# Altium PCB imx6_cpu_board.PcbDoc (part 5 of 9)
Units mil, origin at the board's own origin, x right, y up, seen from the top; angles counter-clockwise.
Board outline 2598.43 x 2362.2 mil, 8 copper layers (Top Layer, GND1, Signal Layer 1, POWER1, POWER2, Signal Layer 2, GND2, Bottom Layer), stack 66.304 mil thick; 354 components, 422 nets, 2180 pads, 1333 vias.
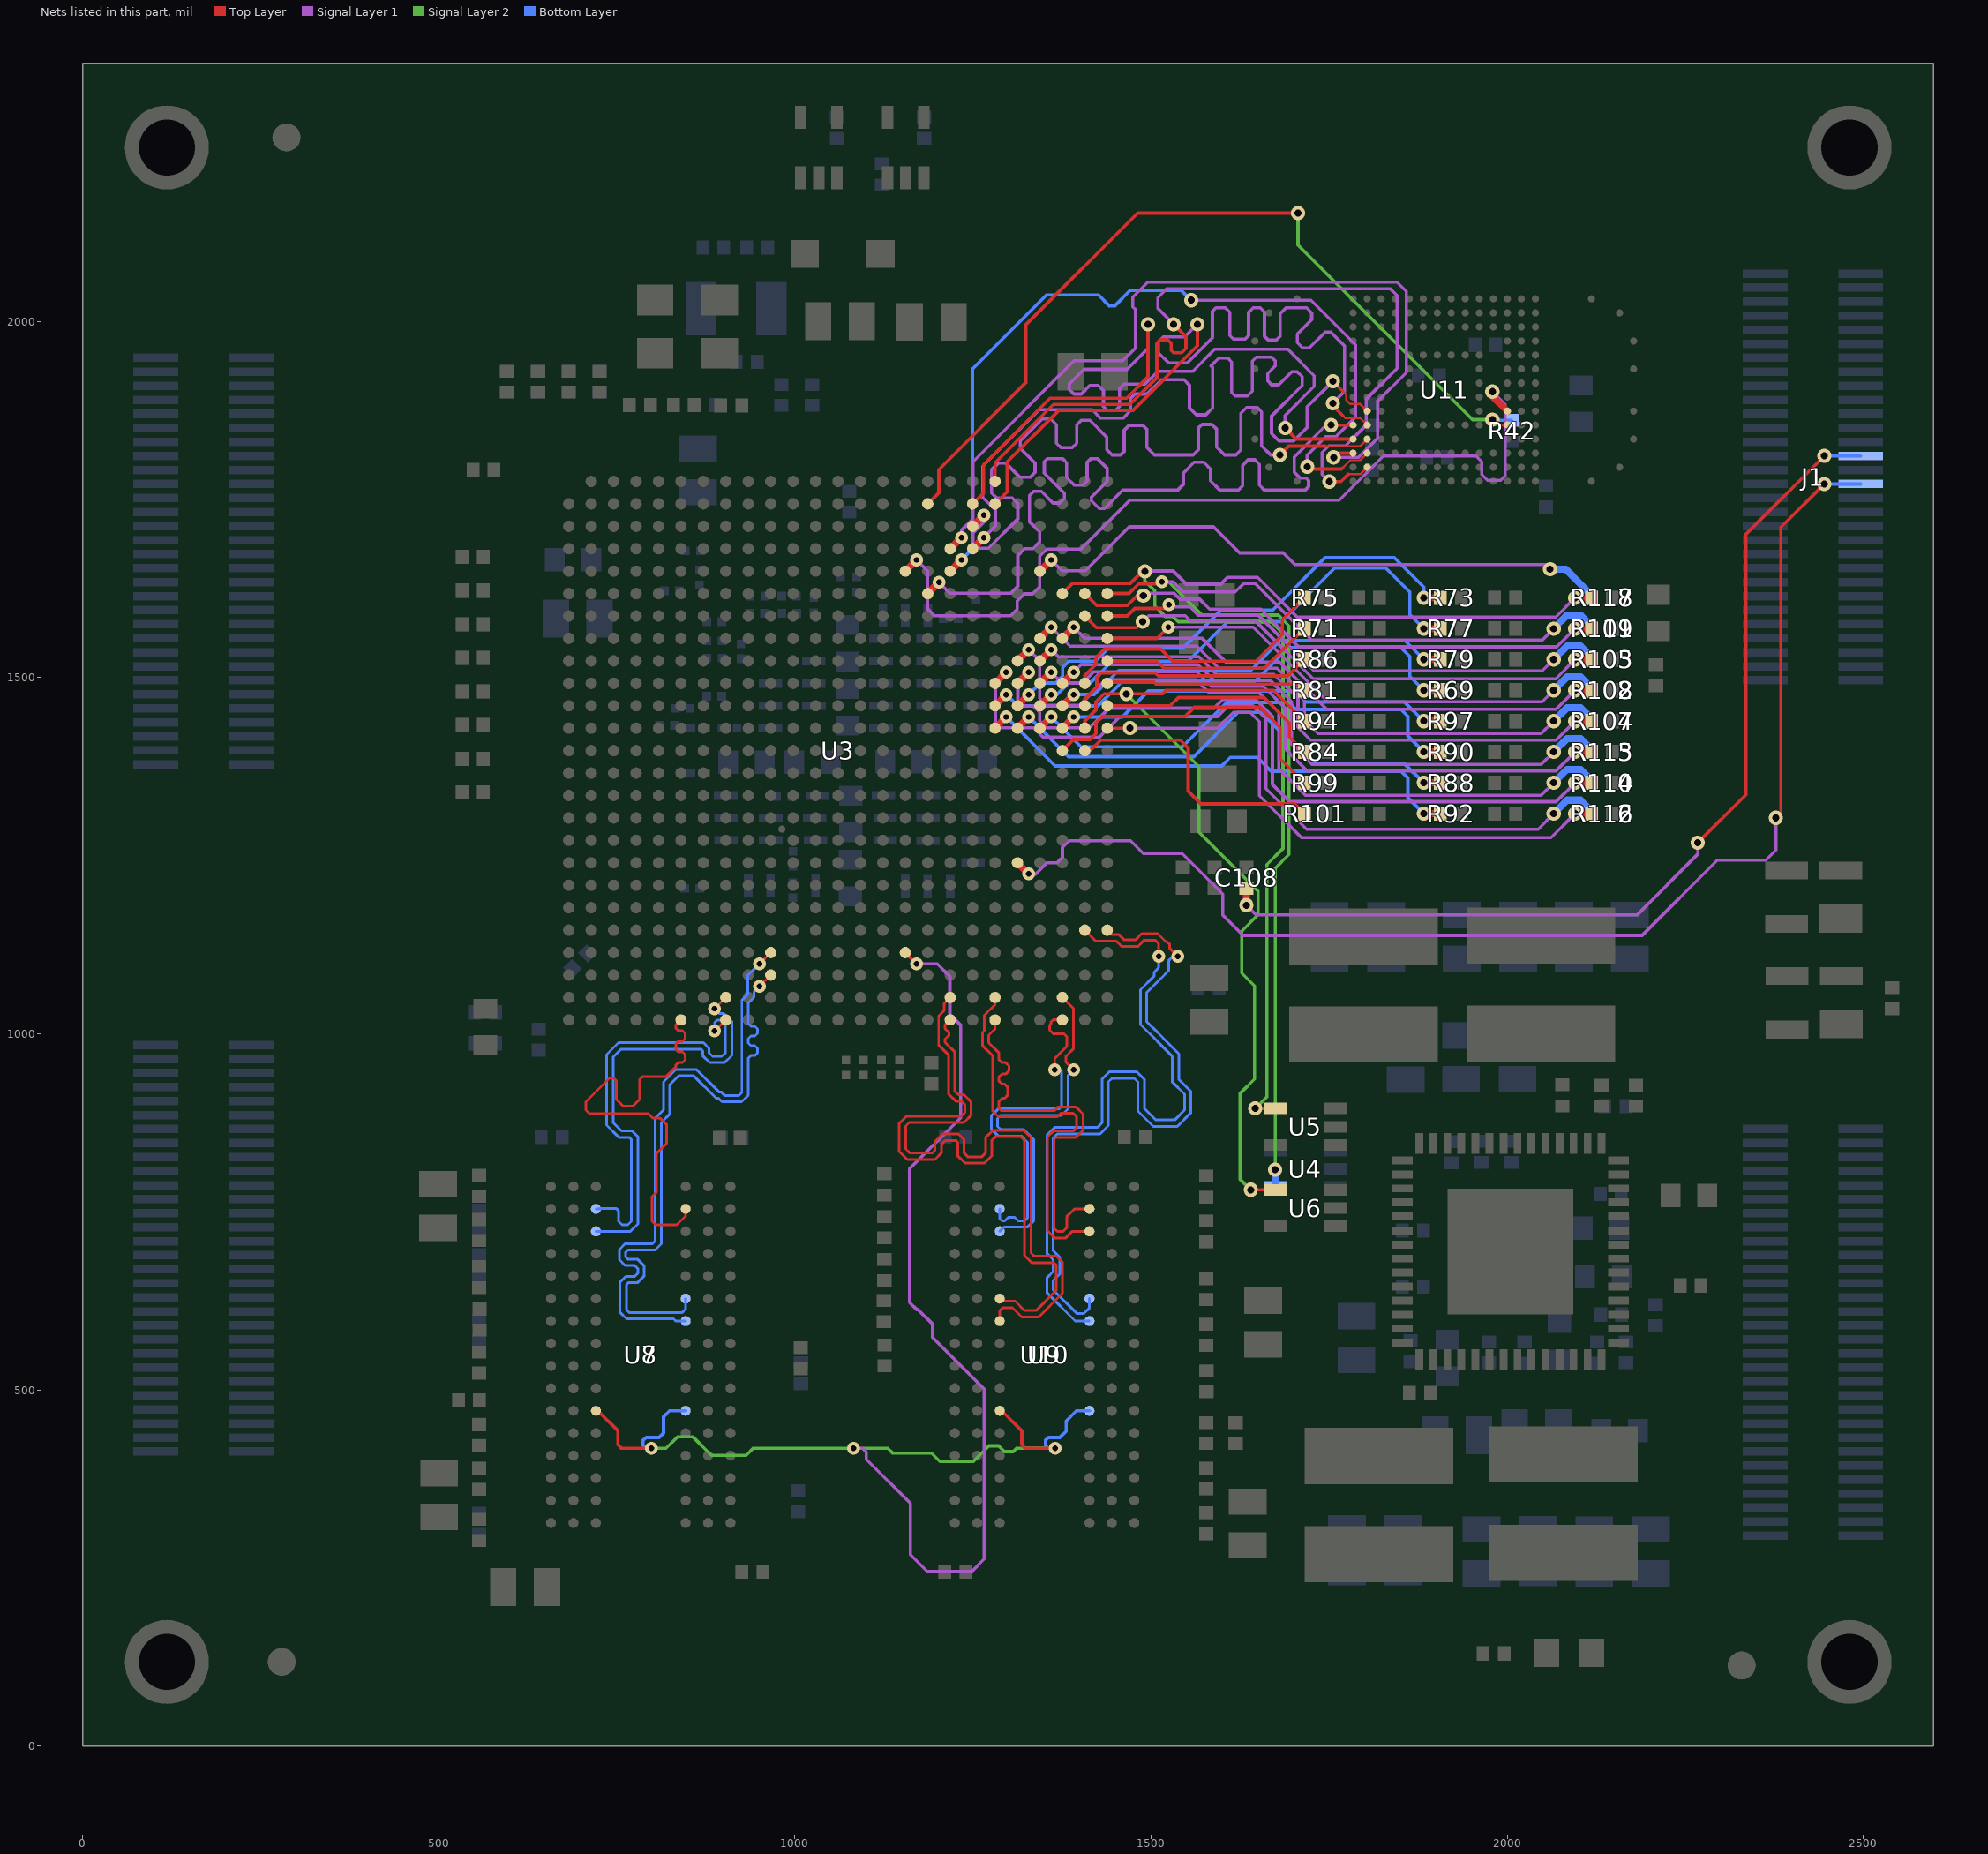
[diagram p11: the nets of this part, all layers, seen from the top]

## Via types
v1: diameter 18, hole 8, Top Layer to Bottom Layer, tented both sides, 768 vias
v2: diameter 20, hole 10, Top Layer to Bottom Layer, tented both sides, 565 vias

## Nets (pads, with @x,y where several pads share a name; then routed paths per layer and width w, separated by ;. In a path a pad name is that pad's centre, name@x,y a point inside that pad or via, vN(x,y) a via of type N, cw(c..) or ccw(c..) an arc to the next point about the centre after c; other vN are vias at no path point) (continued)
DRAM_SDQS1_B: U3.AE6 U8.B7 | length 657.7
  Top Layer w3.7: 812.87,839.21 820,846.35 820,872 810.66,881.34 800.7,881.34 794.2,887.84 711.38,887.84 706.38,892.84 706.38,904.41 739.96,938 745.15,938 749.29,933.87 749.29,907.94 758.89,898.34 772.49,898.34 782.09,907.94 782.09,935.89 785.79,939.59 818.98,939.59 832.53,953.14 832.53,956.03 836.23,959.73 842.03,959.73 845.73,963.43 845.73,970.83 842.03,974.53 836.23,974.53 832.53,978.23 832.53,985.63 836.23,989.33 842.03,989.33 845.73,993.03 845.73,1000.43 842.03,1004.13 836.23,1004.13 832.53,1007.83 832.53,1012.01 U3.AE6@839.91,1019.39 ; 812.88,839.21 805.38,831.71 805.38,777.34 799.33,771.29 799.33,736.58 804.33,731.58 833.96,731.58 846.38,744 846.38,754 U8.B7@846.43,754.07
DRAM_SDQS2: U3.AD8 U7.C7 | length 609
  Top Layer w3.7: v1(887.15,1035.14) U3.AD8@902.9,1050.88
  Bottom Layer w3.7: U7.C7@720.46,722.58 766.08,722.57 769.1,722.59 779.37,732.86 779.37,855.32 771.1,863.59 756.37,863.59 744.6,875.36 744.6,967.03 755.91,978.34 867.65,978.34 870.38,975.61 870.38,969.34 880.38,959.34 901.06,959.34 911.33,969.61 911.33,1017.07 900.06,1028.34 893.95,1028.34 v1(887.15,1035.14)
DRAM_SDQS2_B: U3.AE8 U7.B7 | length 608
  Top Layer w3.7: v1(887.15,1003.64) U3.AE8@902.9,1019.39
  Bottom Layer w3.7: U7.B7@720.46,754.07 725.13,754.06 725.38,754.32 749.37,754.32 752.37,751.32 752.37,736.59 757.37,731.59 765.37,731.59 770.37,736.59 770.37,851.59 767.37,854.59 752.64,854.59 735.6,871.63 735.6,970.76 752.18,987.34 871.38,987.34 879.38,979.34 879.38,973.07 884.11,968.34 897.33,968.34 902.33,973.34 902.33,1013.34 896.33,1019.34 890.83,1019.34 887.15,1015.66 v1(887.15,1003.64)
DRAM_SDQS3: U3.AC10 U7.F3 | length 852.5
  Top Layer w3.7: v1(950.14,1066.63) U3.AC10@965.89,1082.38
  Bottom Layer w3.7: U7.F3@846.44,628.09 846.44,613.4 841.66,608.62 767.1,608.62 763.39,612.33 763.39,647.62 766.1,650.34 778.64,650.34 788.38,660.08 788.38,673.86 778.64,683.6 765.12,683.6 762.39,686.34 762.39,693.35 765.38,696.34 803.63,696.34 812.38,705.09 812.38,875.34 824.38,887.34 824.38,928.65 836.57,940.84 857.88,940.84 889.38,909.34 892.65,909.34 897.65,904.34 925.11,904.34 934.38,913.61 934.38,965.61 938.08,969.31 943.68,969.31 947.38,973.01 947.38,979.31 943.68,983.01 938.08,983.01 934.38,986.71 934.38,993.01 938.08,996.71 943.68,996.71 947.38,1000.41 947.38,1006.71 943.68,1010.41 938.08,1010.41 934.38,1014.11 934.38,1043.14 942.5,1051.26 942.5,1058.98 946.16,1062.64 v1(950.14,1066.63)
DRAM_SDQS3_B: U3.AB10 U7.G3 | length 852.6
  Top Layer w3.7: v1(950.14,1098.13) U3.AB10@965.89,1113.88
  Bottom Layer w3.7: U7.G3@846.44,596.59 832.58,596.58 829.54,599.62 763.37,599.62 754.39,608.6 754.39,651.34 762.36,659.34 774.91,659.34 779.38,663.81 779.38,670.13 774.91,674.6 761.38,674.6 753.39,682.62 753.39,697.08 761.65,705.34 799.9,705.34 803.38,708.82 803.38,881.06 815.38,893.07 815.38,932.38 832.84,949.84 861.61,949.84 893.11,918.34 896.38,918.34 901.38,913.34 921.38,913.34 925.38,917.34 925.38,1046.87 933.5,1054.99 933.5,1081.48 v1(950.14,1098.13)
DRAM_SDQS4: U3.AD18 U10.F3 | length 924.3
  Top Layer w3.7: U3.AD18@1217.86,1050.88 1209.32,1042.34 1209.32,1032.41 1202.61,1025.7 1202.61,1025.57 1201.61,1024.57 1201.61,984.11 1215.38,970.34 1215.38,915.61 1225.65,905.34 1233.38,905.34 1238.38,900.34 1238.38,889.34 1233.38,884.34 1156.65,884.34 1146.38,874.07 1146.38,834.61 1157.65,823.34 1196.38,823.34 1205.38,832.34 1205.38,844.61 1211,850.23 1225.76,850.23 1228.38,847.61 1228.38,828.61 1238.65,818.34 1266.11,818.34 1276.38,828.61 1276.38,850.34 1281.38,855.34 1317.38,855.34 1322.38,850.34 1322.38,688.34 1332.22,678.5 1363.49,678.5 1366.38,675.61 1366.38,639.38 1338.34,611.34 1322.11,611.34 1309.07,624.38 1291.09,624.38 U10.F3@1287.38,628.09
DRAM_SDQS4_B: U3.AE18 U10.G3 | length 923.9
  Top Layer w3.7: U3.AE18@1217.86,1019.39 1217.43,1019.39 1210.61,1012.57 1210.61,1007.11 1216.38,1001.34 1216.38,998.11 1210.61,992.34 1210.61,987.84 1224.38,974.07 1224.38,919.34 1229.38,914.34 1237.11,914.34 1247.38,904.07 1247.38,885.61 1237.11,875.34 1160.38,875.34 1155.38,870.34 1155.38,838.34 1161.38,832.34 1192.65,832.34 1196.38,836.07 1196.38,848.34 1207.27,859.23 1229.49,859.23 1237.38,851.34 1237.38,832.34 1242.38,827.34 1262.38,827.34 1267.38,832.34 1267.38,854.07 1277.65,864.34 1321.11,864.34 1331.38,854.07 1331.38,692.07 1335.95,687.5 1367.22,687.5 1375.38,679.34 1375.38,635.65 1342.07,602.34 1318.38,602.34 1305.34,615.38 1291.42,615.38 1287.39,611.35 U10.G3@1287.38,596.59
DRAM_SDQS5: U3.AD20 U10.C7 | length 558.3
  Top Layer w3.7: U3.AD20@1280.85,1050.88 1280.85,1040.81 1274.68,1034.64 1274.54,1034.64 1265.6,1025.7 1265.6,1004.29 1262.96,1001.65 1262.96,983.55 1277.38,969.13 1277.38,891.61 1285.65,883.34 1368.11,883.34 1373.11,888.34 1390.38,888.34 1395.38,883.34 1395.38,868.34 1390.38,863.34 1362.65,863.34 1354.38,855.07 1354.38,723.61 1364.65,713.34 1380.11,713.34 1389.34,722.57 U10.C7@1413.36,722.58
DRAM_SDQS5_B: U3.AE20 U10.B7 | length 559.1
  Top Layer w3.7: U3.AE20@1280.85,1019.39 1280.85,1006.81 1271.96,997.92 1271.96,987.28 1286.38,972.86 1286.38,963.34 1290.38,959.34 1295.69,959.34 1300.38,954.65 1300.38,948.03 1295.69,943.34 1290.38,943.34 1286.38,939.34 1286.38,933.34 1290.38,929.34 1294.38,929.34 1298.38,925.34 1298.38,913.34 1294.38,909.34 1290.38,909.34 1286.38,905.34 1286.38,895.34 1289.38,892.34 1364.38,892.34 1369.38,897.34 1394.11,897.34 1404.38,887.07 1404.38,864.61 1394.11,854.34 1366.38,854.34 1363.38,851.34 1363.38,727.34 1368.38,722.34 1376.38,722.34 1381.38,727.34 1381.38,743.08 1392.36,754.06 U10.B7@1413.36,754.07
DRAM_SDQS6: U3.AD23 U9.C7 | length 517.4
  Top Layer w3.7: U3.AD23@1375.34,1050.88 1390.59,1035.64 1390.59,978.6 1383.33,971.35 1380.1,968.12 1380.1,960.5 v1(1391.32,949.28)
  Bottom Layer w3.7: U9.C7@1287.39,722.58 1287.61,722.57 1293.38,728.34 1326.11,728.34 1335.38,737.61 1335.38,851.34 1321.38,865.34 1288.88,865.34 1284.38,869.84 1284.38,880.84 1288.88,885.34 1374.11,885.34 1383.38,894.61 1383.38,941.47 1391.25,949.34 1391.25,949.28 v1(1391.32,949.28)
DRAM_SDQS6_B: U3.AE23 U9.B7 | length 517.9
  Top Layer w3.7: v1(1364.51,949.34) 1364.51,965.27 1374.33,975.09 1381.59,982.34 1381.59,995.88 1377.33,1000.14 1362.38,1000.14 1357.38,1005.14 1357.38,1011.37 1359.08,1013.07 1359.08,1016.09 1362.38,1019.39 U3.AE23@1375.34,1019.39
  Bottom Layer w3.7: U9.B7@1287.39,754.07 1287.39,740.34 1290.39,737.34 1294.38,737.34 1299.38,742.34 1308.38,742.34 1313.38,737.34 1322.38,737.34 1326.38,741.34 1326.38,847.61 1317.65,856.34 1285.15,856.34 1275.38,866.11 1275.38,884.57 1285.15,894.34 1370.38,894.34 1374.38,898.34 1374.38,946.39 1371.43,949.34 v1(1364.51,949.34)
DRAM_SDQS7: U3.AA25 U9.F3 | length 1017.7
  Top Layer w3.7: U3.AA25@1438.33,1145.37 1444.65,1139.05 1454.83,1139.05 1462.31,1131.58 1477.84,1131.58 1486.65,1140.39 1509.24,1140.39 1520.37,1129.26 1522.19,1129.26 1526.03,1125.42 1526.03,1119.56 v1(1537.25,1108.34)
  Bottom Layer w3.7: U9.F3@1413.37,628.09 1413.37,615.02 1405.7,607.34 1395.38,607.34 1362.38,640.34 1362.38,653.34 1371.38,662.34 1371.38,686.34 1362.38,695.34 1362.38,853.34 1368.38,859.34 1428.29,859.34 1439.88,870.93 1439.88,932.34 1444.88,937.34 1476.33,937.34 1481.33,932.34 1481.33,891.39 1502.83,869.89 1536.56,869.89 1555.84,889.16 1555.84,918.61 1538.83,935.62 1538.83,971.62 1517.23,993.22 1517.23,993.64 1502.68,1008.19 1502.26,1008.19 1493.83,1016.62 1493.83,1058.06 1513.16,1077.39 1513.33,1077.39 1524.33,1088.39 1524.33,1102.34 1530.34,1108.34 v1(1537.25,1108.34)
DRAM_SDQS7_B: U3.AA24 U9.G3 | length 1017.5
  Top Layer w3.7: U3.AA24@1406.84,1145.37 1422.15,1130.05 1451.1,1130.05 1458.58,1122.58 1481.57,1122.58 1490.38,1131.39 1505.51,1131.39 1510.51,1126.39 v1(1510.51,1108.34)
  Bottom Layer w3.7: U9.G3@1413.37,596.59 1393.41,596.58 1353.38,636.61 1353.38,657.07 1362.38,666.07 1362.38,682.61 1353.38,691.61 1353.38,857.07 1364.65,868.34 1424.56,868.34 1430.88,874.66 1430.88,936.07 1441.15,946.34 1480.06,946.34 1490.33,936.07 1490.33,895.12 1506.56,878.89 1532.83,878.89 1546.84,892.89 1546.84,914.88 1529.83,931.89 1529.83,967.89 1508.23,989.49 1508.23,989.91 1498.95,999.19 1498.53,999.19 1484.83,1012.89 1484.83,1061.79 1504.42,1081.38 1504.42,1086.39 1510.51,1092.48 v1(1510.51,1108.34)
DRAM_WE_B: U3.AB16 U7.L3 U8.L3 U9.L3 U10.L3 | length 2338.3
  Top Layer w4.7: U8.L3@720.45,470.61 723.19,470.6 751.45,442.34 751.45,422.84 756.45,417.84 v1(798.45,417.84) ; U3.AB16@1154.87,1113.88 v1(1170.62,1098.13) ; U10.L3@1287.38,470.61 1290.12,470.6 1318.38,442.34 1318.38,422.84 1323.38,417.84 v1(1365.38,417.84)
  Signal Layer 1 w4.5: v1(1081.88,417.84) 1094.88,417.84 1100.05,412.67 1100.05,402.55 1161.88,340.73 1161.88,268.84 1185.38,245.34 1248.38,245.34 1265.38,262.34 1265.38,501.34 1193.13,573.59 1193.13,592.27 1172.57,612.83 1170.83,612.83 1160.87,622.79 1160.87,810.31 1229.39,878.83 ; v1(1170.62,1098.13) 1199.59,1098.13 1217.38,1080.34 1217.38,1027.34 1232.38,1012.34 1232.38,881.85 1230.88,880.35 ; 1229.39,878.85 1230.88,880.34
  Signal Layer 2 w4.5: v1(798.45,417.84) 818.79,417.84 834.83,433.89 856.83,433.89 882.61,408.11 931.5,408.11 941.24,417.84 v1(1081.88,417.84) 1130.34,417.84 1136.84,411.34 1191.35,411.34 1191.7,410.99 1202.86,399.84 ; 1202.88,399.84 1203.38,399.34 1250.29,399.34 1272.33,421.39 1285.83,421.39 1293.88,413.34 1306.38,413.34 1310.88,417.84 v1(1365.38,417.84)
  Bottom Layer w4.7: v1(798.45,417.84) 790.88,417.84 786.38,422.34 786.38,428.69 790.88,433.19 809.23,433.19 815.47,439.43 815.47,462.24 823.83,470.6 U7.L3@846.44,470.61 ; v1(1365.38,417.84) 1355.88,417.84 1351.38,422.34 1351.38,428.69 1355.88,433.19 1371.74,433.19 1380.73,442.18 1380.73,456.39 1394.94,470.6 U9.L3@1413.37,470.61
EIM-A16: R102.1 U3.H25 | length 754.4
  Top Layer w4.7: U3.H25@1438.33,1554.82 1508.25,1554.82 v1(1524,1570.57)
  Signal Layer 1 w4.5: v1(1524,1570.57) 1643.2,1570.57 1747.96,1465.81 2048.77,1465.81 v2(2065,1482.05)
  Bottom Layer w10: v2@2065,1482.08 2083.97,1501.05 2102.87,1501.05 2118.11,1485.81 R102.1@2118.11,1482.05
EIM-A17: R103.1 U3.G24 | length 772.7
  Top Layer w4.7: U3.G24@1406.84,1586.32 1423.16,1570 1479.63,1570 v2(1488,1578.37)
  Top Layer w10: v2(2095,1525.35) R103.1@2118.11,1525.35
  Signal Layer 1 w4.5: v2(1488,1578.37) 1496.27,1586.64 1547.81,1586.64 1555.38,1579.07 1646.72,1579.07 1727.48,1498.31 1760.95,1498.31 1774.42,1498.33 ; 1774.44,1498.31 1837.13,1498.31 1850.61,1498.33 2067.96,1498.31 v2(2095,1525.35)
EIM-A18: R104.1 U3.J22 | length 868.3
  Top Layer w10: U3.J22@1343.84,1523.32 v1(1359.59,1539.07) ; v2(2095,1438.74) R104.1@2118.11,1438.74
  Signal Layer 1 w4.5: v1(1359.59,1539.07) 1369.66,1529 1566.98,1529 1591.48,1504.5 1672.5,1504.5 1706.1,1470.9 1706.1,1429.9 1723.79,1412.21 2068.47,1412.21 v2(2095,1438.74)
EIM-A19: R105.1 U3.G25 | length 749.4
  Top Layer w4.7: U3.G25@1438.33,1586.32 1466.32,1586.32 1477,1597 1520,1597 v1(1525,1602)
  Signal Layer 1 w4.5: v1(1525,1602) 1528.05,1598.95 1554.58,1598.95 1565.96,1587.57 1650.24,1587.57 1728.68,1509.14 1875.77,1509.14 ; 1875.78,1509.12 2048.77,1509.12 v2(2065,1525.35)
  Bottom Layer w10: v2@2065,1525.39 2083.97,1544.35 2102.87,1544.35 2118.11,1529.11 R105.1@2118.11,1525.35
EIM-A20: R107.1 U3.H22 | length 888
  Top Layer w10: U3.H22@1343.84,1554.82 v1(1359.59,1570.57)
  Signal Layer 1 w4.5: v1(1359.59,1570.57) 1386.16,1544 1564,1544 1595,1513 1676.73,1513 1715.1,1474.63 1715.1,1440.28 1734.17,1421.21 2047.47,1421.21 v2(2065,1438.74)
  Bottom Layer w10: v2(2065,1438.74) 2083.97,1457.74 2102.87,1457.74 2118.11,1442.5 R107.1@2118.11,1438.74
EIM-A21: R108.1 U3.H23 | length 807.9
  Top Layer w10: U3.H23@1375.34,1554.82 v1(1391.08,1570.57) ; v2(2095,1482.05) R108.1@2118.11,1482.05
  Signal Layer 1 w4.5: v1(1391.08,1570.57) 1406.33,1555.32 1571.18,1555.32 1605,1521.5 1680.25,1521.5 1746.23,1455.52 2068.47,1455.52 v2(2095,1482.05)
EIM-A22: R109.1 U3.F24 | length 767.2
  Top Layer w4.7: U3.F24@1406.84,1617.81 1423.65,1601 1466.38,1601 1480.38,1615 v2(1489,1615)
  Top Layer w10: v2(2095,1568.66) R109.1@2118.11,1568.66
  Signal Layer 1 w4.5: v2(1489,1615) 1492.31,1618.31 1532,1618.31 1540.31,1610 1567.89,1610 1581.82,1596.07 1653.76,1596.07 1706.83,1543 2069.34,1543 v2(2095,1568.66)
EIM-A23: R110.1 U3.J21 | length 1029.5
  Top Layer w10: U3.J21@1312.35,1523.32 v1(1328.09,1539.07)
  Signal Layer 1 w4.5: v1(1328.09,1539.07) 1343.34,1523.82 1343.34,1470.76 1353.27,1460.83 1399.52,1460.83 1435.68,1497 1562.92,1497 1581.82,1478.1 1651.9,1478.1 1679.1,1450.9 1679.1,1372 1716.5,1334.6 2047.47,1334.6 v2(2065,1352.13)
  Bottom Layer w10: v2(2065,1352.13) 2083.97,1371.13 2102.87,1371.13 2118.11,1355.89 R110.1@2118.11,1352.13
EIM-A24: R111.1 U3.F25 U4.4 | length 1755.1
  Top Layer w4.7: U3.F25@1438.33,1617.81 1468.69,1617.81 1482.23,1631.35 1512.05,1631.35 v1(1515,1634.3)
  Signal Layer 1 w4.5: v1(1515,1634.3) 1530.7,1634.3 1545,1620 1618,1620 1629.95,1631.95 1645.93,1631.95 1725.45,1552.43 2048.77,1552.43 v2(2065,1568.66)
  Signal Layer 2 w4.5: v1(1515,1634.3) 1524.4,1634.3 1571.13,1587.57 1678.43,1587.57 1693.5,1572.5 1693.5,1251.5 1673.99,1231.99 v2(1673.99,809.3)
  Bottom Layer w10: U4.4@1673.99,784.72 v2(1673.99,809.3) ; v2@2065,1568.69 2083.97,1587.66 2102.87,1587.66 2118.11,1572.42 R111.1@2118.11,1568.66
EIM-DA0: R69.1 U3.L20 | length 713.1
  Top Layer w10: U3.L20@1280.85,1460.33 v1(1296.6,1476.08) ; v2(1882.51,1482.06) R69.1@1905.86,1482.06
  Bottom Layer w4.7: v1(1296.6,1476.08) 1312.68,1460 1425,1460 1448.65,1483.65 1448.65,1483.77 1459.88,1495 1646,1495 1692.74,1541.74 1850.65,1541.74 1863,1529.38 1863,1501.58 v2(1882.51,1482.06)
EIM-DA1: R71.1 U3.J25 | length 303.9
  Top Layer w4.7: U3.J25@1438.33,1523.32 1507.68,1523.32 1518,1513 1659.17,1513 R71.1@1714.87,1568.69
EIM-DA2: R73.1 U3.L21 | length 718.5
  Top Layer w10: U3.L21@1312.35,1460.33 v1(1328.09,1476.08) ; v2(1882.52,1611.98) R73.1@1905.87,1611.98
  Bottom Layer w4.7: v1(1328.09,1476.08) 1344.24,1492.23 1365.95,1492.23 1375.73,1502.01 1375.73,1513.94 1384.72,1522.93 1421.93,1522.93 1440,1541 1544.3,1541 1597.79,1594.49 1670.49,1594.49 1744,1668 1841.52,1668 1882.52,1627 v2(1882.52,1611.98)
EIM-DA3: R75.1 U3.K24 | length 396.2
  Top Layer w4.7: U3.K24@1406.84,1491.83 1406.84,1502.84 1422.59,1518.59 1422.59,1527.88 1434.71,1540 1513.37,1540 1530.37,1523 1647,1523 1684,1560 1684,1581.13 R75.1@1714.87,1612
EIM-DA4: R77.1 U3.L22 | length 695.8
  Top Layer w10: U3.L22@1343.84,1460.33 v1(1359.59,1476.08) ; v2(1882.51,1568.68) R77.1@1905.86,1568.68
  Bottom Layer w4.7: v1(1359.59,1476.08) 1368.08,1476.08 1384.22,1492.22 1414.29,1492.22 1445,1522.93 1551.93,1522.93 1607.37,1578.37 1682.37,1578.37 1757.54,1653.54 1829.46,1653.54 1863,1620 1863,1588.19 v2(1882.51,1568.68)
EIM-DA5: R79.1 U3.L23 | length 579.5
  Top Layer w10: U3.L23@1375.34,1460.33 v1(1391.08,1476.08) ; v2(1882.51,1525.37) R79.1@1905.86,1525.37
  Bottom Layer w4.7: v1(1391.08,1476.08) 1420.34,1476.08 1454.26,1510 1639.65,1510 1681.65,1552 1855.88,1552 v2(1882.51,1525.37)
EIM-DA6: R81.1 U3.K25 | length 281.8
  Top Layer w4.7: U3.K25@1438.33,1491.83 1439.85,1493.35 1503.79,1493.35 1506.36,1490.78 1706.17,1490.78 R81.1@1714.87,1482.08
EIM-DA7: R84.1 U3.L25 | length 324.6
  Top Layer w4.7: U3.L25@1438.33,1460.33 1526.38,1460.33 1538.04,1472 1658,1472 1694,1436 1694,1416.33 R84.1@1714.87,1395.46
EIM-DA8: R86.1 U3.L24 | length 351.8
  Top Layer w4.7: U3.L24@1406.84,1460.33 1406.84,1469.84 1423.51,1486.51 1423.51,1499.85 1429.84,1506.18 1505.82,1506.18 1510,1502 1691.48,1502 R86.1@1714.87,1525.39
EIM-DA9: R88.1 U3.M21 | length 689.3
  Top Layer w10: U3.M21@1312.35,1428.84 v1(1328.09,1444.59) ; v2(1882.51,1352.14) R88.1@1905.86,1352.14
  Bottom Layer w4.7: v1(1328.09,1444.59) 1383.68,1389 1560,1389 1621,1450 ; 1621,1451 1654,1451 1725.89,1379.11 1855.54,1379.11 v2(1882.51,1352.14)
EIM-DA10: R90.1 U3.M22 | length 656.7
  Top Layer w10: U3.M22@1343.84,1428.84 v1(1359.59,1444.59) ; v2(1882.51,1395.45) R90.1@1905.86,1395.45
  Bottom Layer w4.7: v1(1359.59,1444.59) 1401.41,1402.78 1543.78,1402.78 1606,1465 1693.17,1465 1703.05,1455.12 1850.65,1455.12 1860.22,1445.54 1860.22,1417.74 v2(1882.51,1395.45)
EIM-DA11: R92.1 U3.M20 | length 714
  Top Layer w10: U3.M20@1280.85,1428.84 v1(1296.6,1444.59) ; v2(1882.51,1308.83) R92.1@1905.86,1308.83
  Bottom Layer w4.7: v1(1296.6,1444.59) 1365.19,1376 1599,1376 1611,1388 1649,1388 1668.49,1368.51 1825,1368.51 1850.64,1368.51 1860.22,1358.93 1860.22,1331.13 v2(1882.51,1308.83)
EIM-DA12: R94.1 U3.M24 U6.4 | length 1198.9
  Top Layer w4.7: U3.M24@1406.84,1428.84 1406.84,1438.84 1422.59,1454.59 1422.59,1465.78 1433.81,1477 v2(1465,1477) 1516,1477 1521.08,1482.08 1671.56,1482.08 R94.1@1714.87,1438.77 ; v2(1639.62,780.87) v2(1639.62,780.87) U6.4@1673.99,780.81
  Signal Layer 2 w4.5: v2(1465,1477) 1567,1375 1567,1283 1650,1200 1650,1167 1627,1144 1627,1085 1645,1067 1645,936.36 1625,916.36 1625,795.49 v2(1639.62,780.87)
EIM-DA13: R97.1 U3.M23 | length 569.7
  Top Layer w10: U3.M23@1375.34,1428.84 v1(1391.08,1444.59) ; v2(1882.51,1438.76) R97.1@1905.86,1438.76
  Bottom Layer w4.7: v1(1391.08,1444.59) 1459.59,1444.59 1496.13,1481.13 1702.12,1481.13 1717.52,1465.73 1855.54,1465.73 v2(1882.51,1438.76)
EIM-DA14: R99.1 U3.N23 | length 443
  Top Layer w4.7: U3.N23@1375.34,1397.34 1390.85,1412.85 1414,1412.85 1422.59,1421.44 1422.59,1436.18 1431.76,1445.35 1547.63,1445.35 1560.41,1458.13 1652.87,1458.13 1681,1430 1681,1386.02 R99.1@1714.87,1352.16
EIM-DA15: R101.1 U3.N24 | length 392.2
  Top Layer w4.7: U3.N24@1406.84,1397.34 1414.49,1397.34 1429.15,1412 1541,1412 1552,1401 1552,1340.6 1569.88,1322.72 1701,1322.72 R101.1@1714.87,1308.85
EIM-EB0: R114.1 U3.K21 | length 1038.2
  Top Layer w10: U3.K21@1312.35,1491.83 v1(1328.09,1507.58) ; v2(2095,1352.13) R114.1@2118.11,1352.13
  Signal Layer 1 w4.5: v1(1328.09,1507.58) 1312.84,1492.33 1312.84,1469.76 1322.76,1459.84 1334.41,1459.84 1343.34,1450.91 1343.34,1439.27 1353.27,1429.34 1413.34,1429.34 1441,1457 1588.33,1457 1600.43,1469.1 1646.53,1469.1 1670.1,1445.53 1670.1,1349.9 1694.4,1325.6 2068.47,1325.6 v2(2095,1352.13)
EIM-EB1: R115.1 U3.K23 | length 871.7
  Top Layer w10: U3.K23@1375.34,1491.83 v1(1391.08,1507.58)
  Signal Layer 1 w4.5: v1(1391.08,1507.58) 1401.5,1518 1565.96,1518 1587.96,1496 1667,1496 1697.1,1465.9 1697.1,1406.49 1725.68,1377.91 2047.47,1377.91 v2(2065,1395.43)
  Bottom Layer w10: v2(2065,1395.43) 2083.97,1414.43 2102.87,1414.43 2118.11,1399.19 R115.1@2118.11,1395.43
EIM-EB2: R117.1 U3.E22 | length 856.1
  Top Layer w10: U3.E22@1343.84,1649.31 v1(1359.59,1665.06)
  Signal Layer 1 w4.5: v1(1359.59,1665.06) 1374.84,1649.81 1407.44,1649.81 1469.13,1711.5 1587.52,1711.5 1624.07,1674.95 1685.36,1674.95 1701.75,1658.56 2053.44,1658.56 v2(2060,1652)
  Bottom Layer w10: v2(2060,1652) 2081.84,1652 2102.87,1630.97 2118.11,1615.73 R117.1@2118.11,1611.97
EIM-EB3: R118.1 U3.F23 U5.4 | length 1763.3
  Top Layer w4.7: U3.F23@1375.34,1617.81 1389.69,1632.16 1470.74,1632.16 1487.39,1648.81 v2(1491,1648.81) ; v2(1645.94,894.98) U5.4@1673.99,894.98
  Top Layer w10: v2(2095,1611.97) R118.1@2118.11,1611.97
  Signal Layer 1 w4.5: v2(1491,1648.81) 1491.74,1649.55 1530.72,1649.55 1549.27,1631 1597.58,1631 1607.03,1640.45 1649.45,1640.45 1704.96,1584.94 2067.97,1584.94 v2(2095,1611.97)
  Signal Layer 2 w4.5: v2(1491,1648.81) 1491,1635.98 1505.25,1621.73 1505.25,1600.18 1519.61,1585.82 1530.32,1585.82 1537.77,1578.37 1669,1578.37 1685,1562.37 1685,1260 1662.25,1237.25 1662.25,911.29 v2(1645.94,894.98)
EIM-LBA: R113.1 U3.K22 | length 895.7
  Top Layer w10: U3.K22@1343.84,1491.83 v1(1359.59,1507.58) ; v2(2095,1395.43) R113.1@2118.11,1395.43
  Signal Layer 1 w4.5: v1(1359.59,1507.58) 1374.84,1492.33 1403.71,1492.33 1419.38,1508 1563.94,1508 1584.44,1487.5 1657.5,1487.5 1688.1,1456.9 1688.1,1399.74 1718.93,1368.91 2068.47,1368.91 v2(2095,1395.43)
EIM-RW: R116.1 U3.K20 | length 1118.2
  Top Layer w10: U3.K20@1280.85,1491.83 v1(1296.6,1507.58)
  Signal Layer 1 w4.5: v1(1296.6,1507.58) 1281.35,1492.33 1281.35,1438.27 1290.28,1429.34 1335,1429.34 1348.34,1416 1427,1416 1456.25,1445.25 1593.13,1445.25 1607.98,1460.1 1642.8,1460.1 1661.1,1441.8 1661.1,1343.9 1718,1287 2043.18,1287 v2(2065,1308.82)
  Bottom Layer w10: v2(2065,1308.82) 2083.97,1327.82 2102.87,1327.82 2118.11,1312.58 R116.1@2118.11,1308.82
EIM-WAIT: R112.1 U3.M25 | length 836.8
  Top Layer w4.7: U3.M25@1438.33,1428.84 1469.84,1428.84 v2(1470,1429)
  Top Layer w10: v2(2095,1308.82) R112.1@2118.11,1308.82
  Signal Layer 1 w4.5: v2(1470,1429) 1593.35,1429 1615.35,1451 1639.03,1451 1652,1438.03 1652,1334 1711,1275 2061.18,1275 v2(2095,1308.82)
EMMC-CLK: U3.E16 U11.W6 | length 1226.1
  Top Layer w10: U3.E16@1154.87,1649.31 v1(1170.62,1665.06) ; v2(1979,1901.32) 1979,1895.01 U11.W6@2000,1874.01
  Signal Layer 1 w4.5: v1(1170.62,1665.06) 1185.87,1649.81 1185.87,1596.74 1195.79,1586.82 1302.92,1586.82 1311.85,1595.75 1311.85,1607.4 1321.77,1617.32 1333.43,1617.32 1343.35,1627.24 1343.35,1670.39 1353.27,1680.31 1401.31,1680.31 1470,1749 1764,1749 1826,1811 1956,1811 1964,1803 1964,1785 1972.14,1776.86 1990.86,1776.86 1997,1783 1997,1883.32 v2(1979,1901.32)
EMMC-CMD: R42.1 U3.B17 U11.W5 | length 1226.4
  Top Layer w4.7: U3.B17@1186.36,1743.8 1201.8,1759.24 1201.8,1791.8 1324,1914 1324,1995 1481,2152 v2(1706.17,2152) ; v2(1979,1862) 1986.67,1854.33 U11.W5@2000,1854.33
  Signal Layer 2 w4.5: v2(1706.17,2152) 1706.17,2106.92 1951.09,1862 v2(1979,1862)
  Bottom Layer w4.7: v2(1979,1862) 1980,1861 R42.1@2006,1861
EMMC-DATA0: U3.D18 U11.H3 | length 1226.4
  Top Layer w4.7: v2(1756,1809) 1761.96,1814.96 U11.H3@1783.47,1814.96
  Top Layer w10: U3.D18@1217.86,1680.8 v1(1233.61,1696.55)
  Signal Layer 1 w4.5: v1(1233.61,1696.55) 1233.61,1706.48 1249.86,1722.73 1249.86,1802.86 1391.89,1944.89 1460.45,1944.89 1478.12,1962.56 1478.12,2016.44 1474.13,2020.43 1474.13,2033.89 1495.24,2055 1845,2055 1858,2042 1858,1928 1818,1888 1818,1836 1791,1809 v2(1756,1809)
EMMC-DATA1: U3.B19 U11.H4 | length 1226.9
  Top Layer w4.7: U3.B19@1249.36,1743.8 1264.9,1759.34 1264.9,1798.9 1358,1892 1465.47,1892 1495.38,1921.9 v2(1495.38,1996) ; v2(1688,1850.39) 1703.75,1834.64 U11.H4@1783.47,1834.64
  Signal Layer 1 w4.5: v2(1495.38,1996) 1495.38,1962 1465.95,1932.57 1405.46,1932.57 1385,1912.11 1385,1904.55 1391.55,1898 1401.88,1898 1413.88,1910 1425.78,1910 1433,1902.78 1433,1880.33 1438.73,1874.6 1449.6,1874.6 1455.78,1880.78 1455.78,1905.78 1462,1912 1491.34,1912 1509.34,1930 1558.2,1930 1589.2,1961 1691.44,1961 1728.68,1923.77 1728.68,1908.68 1688,1868 v2(1688,1850.39)
EMMC-DATA2: U3.F17 U11.H5 | length 1226.8
  Top Layer w4.7: v2(1752.5,1854.33) U11.H5@1783.47,1854.33
  Top Layer w10: U3.F17@1186.36,1617.81 v1(1202.11,1633.56)
  Signal Layer 1 w4.5: v1(1202.11,1633.56) 1217.36,1618.31 1302.92,1618.31 1312.85,1628.24 1312.85,1671.38 1322.47,1681 1334.12,1681 1343.45,1690.33 1343.45,1704.55 1329,1719 1329,1755.18 1335.1,1761.28 1345.88,1761.28 1362.16,1745 1372,1745 1378,1751 1378,1758.66 1350,1786.66 1350,1803 1354,1807 1375.84,1807 1381.38,1801.46 1381.38,1780.62 1392,1770 1404.16,1770 1410,1775.84 1410,1802 1415,1807 1425,1807 1438,1794 1438,1774.96 1416,1752.96 1416,1748.38 1427,1737.38 1434.36,1737.38 1459.98,1763 1537,1763 1545,1771 1545,1786.91 1560.29,1802.2 1573.71,1802.2 1583.2,1792.71 1583.2,1776.13 1596.33,1763 1622,1763 1628.2,1769.2 1628.2,1797.7 1636.08,1805.58 1645.42,1805.58 1652,1799 1652,1770 1659,1763 1716,1763 1721,1768 1721,1776.46 1717.66,1779.8 1709.2,1779.8 1701,1788 1701,1809.74 1745.59,1854.33 v2(1752.5,1854.33)
EMMC-DATA3: U3.A20 U11.J2 | length 1226.3
  Top Layer w3: 1776.83,1785.39 1793.27,1785.39 U11.J2@1803.15,1795.27
  Top Layer w4.7: U3.A20@1280.85,1775.29 1280.85,1801.47 1362.68,1883.3 1470.17,1883.3 1507.87,1921 1507.87,1968.87 1513,1974 1523,1974 1528,1969 1528,1959.22 1531.39,1955.82 1542.7,1955.82 1548.87,1962 1548.87,1978.53 v2(1531.39,1996) ; v2(1750,1775) 1766.44,1775 1776.83,1785.39
  Signal Layer 1 w4.5: v2(1531.39,1996) 1509.38,2018.02 1509.38,2033.38 1521.86,2045.86 1835.34,2045.86 1845,2036.2 1845,1934 1802,1891 1802,1854.71 1772.54,1825.25 1749.27,1825.25 1739.75,1815.73 1739.75,1785.25 v2(1750,1775)
EMMC-DATA4: U3.E18 U11.J3 | length 1226.8
  Top Layer w3: 1768.54,1794.2 1779.41,1805.07 1793.26,1805.07 U11.J3@1803.15,1814.96
  Top Layer w4.7: v2(1719,1796) 1722.46,1792.54 1766.88,1792.54 1768.54,1794.2
  Top Layer w10: U3.E18@1217.86,1649.31 v1(1233.61,1665.06)
  Signal Layer 1 w4.5: v2(1556,2029.61) 1724.39,2029.61 1787,1967 1787,1865.85 1759.23,1838.08 1745.08,1838.08 1719,1812 v2(1719,1796)
  Bottom Layer w4.7: v1(1233.61,1665.06) 1248.96,1680.41 1248.96,1932.96 1353,2037 1426,2037 1441,2022 1449,2022 1470.51,2043.51 1542.1,2043.51 v2(1556,2029.61)
EMMC-DATA5: U3.C19 U11.J4 | length 1226.8
  Top Layer w3: 1744,1824.84 1793.35,1824.84 U11.J4@1803.15,1834.64
  Top Layer w4.7: v2(1680.72,1812.44) 1693.12,1824.84 1744,1824.84
  Top Layer w10: U3.C19@1249.36,1712.3 v1(1265.11,1728.05)
  Signal Layer 1 w4.5: v1(1265.11,1728.05) 1265.11,1718.12 1249.86,1702.87 1249.86,1690.23 1258.79,1681.3 1271.43,1681.3 1312.85,1722.72 1312.85,1744.29 1305.14,1752 1283,1752 1276,1759 1276,1792 1284.81,1800.81 1296.19,1800.81 1316,1781 1330.12,1781 1337,1787.88 1337,1801 1316,1822 1316,1832 1347,1863 1359,1863 1367,1855 1367,1829 1373.47,1822.53 1389,1822.53 1395.47,1829 1395.47,1854.47 1402,1861 1414,1861 1437.38,1837.62 1437.38,1820.06 1445,1812.44 1457,1812.44 1462,1817.44 1462,1847.05 1468.95,1854 1488.38,1854 1494,1848.38 1494,1823 1504.56,1812.44 1559,1812.44 1566.2,1819.64 1566.2,1850.2 1571.29,1855.29 1585.04,1855.29 1592,1848.33 1592,1823.44 1603,1812.44 1619,1812.44 1626,1819.44 1626,1871 1634,1879 1649,1879 1655,1873 1655,1825 1667.56,1812.44 v2(1680.72,1812.44)
EMMC-DATA6: U3.B20 U11.J5 | length 1226.5
  Top Layer w3: 1768.64,1868 1772.51,1864.13 1793.35,1864.13 U11.J5@1803.15,1854.33
  Top Layer w4.7: U3.B20@1280.85,1743.8 1297.6,1760.55 1297.6,1802.6 1369.6,1874.6 1473.78,1874.6 1565,1965.82 v2(1565,1996) ; v2(1755,1885) 1755,1881.64 1768.64,1868
  Signal Layer 1 w4.5: v2(1565,1996) 1547,1978 1517,1978 1510,1971 1510,1956 1524.18,1941.82 1550.82,1941.82 1586,1977 1586,2014 1591,2019 1604,2019 1610.3,2012.7 1610.3,1980 1615.3,1975 1631.7,1975 1636.7,1980 1636.7,2012.45 1643.25,2019 1653,2019 1659,2013 1659,1979 1664,1974 1676,1974 1681,1979 1681,2010.7 1689.3,2019 1718,2019 1725.34,2011.66 1725.34,2002.4 1705,1982.07 1705,1970 1712.44,1962.56 1722.06,1962.56 1744.5,1985 1752,1985 1771.25,1965.75 1771.25,1901.25 v2(1755,1885)
EMMC-DATA7: U3.D19 U11.J6 | length 1226.7
  Top Layer w3: 1769,1902 1773.67,1897.33 1773.67,1889.64 1779.41,1883.9 1793.26,1883.9 U11.J6@1803.15,1874.01
  Top Layer w4.7: v2(1755,1916) 1769,1902
  Top Layer w10: U3.D19@1249.36,1680.8 v1(1265.11,1696.55)
  Signal Layer 1 w4.5: v1(1265.11,1696.55) 1281.35,1712.79 1281.35,1735 1263.56,1752.79 1263.56,1796.56 1343,1876 1417,1876 1429,1864 1460.38,1864 1471,1874.62 1471,1891.62 1477.38,1898 1494.38,1898 1514.38,1918 1546,1918 1553.8,1910.2 1553.8,1878.29 1563.29,1868.8 1576.71,1868.8 1586.2,1878.29 1586.2,1935.3 1584,1937.5 1594.95,1948.45 1607.55,1948.45 1613,1943 1613,1900 1618,1895 1635,1895 1642,1902 1642,1944 1647.5,1949.5 1669.04,1949.5 1674,1944.55 1674,1937.34 1663.5,1926.84 1663.5,1916.5 1669,1911 1679,1911 1697,1929 1705.29,1929 1712,1922.29 1712,1910 1669,1867 1669,1842.41 1679.41,1832 1700,1832 1718.93,1850.93 1718.93,1879.93 v2(1755,1916)
ENET-REF-CLK: C108.2 J1.28 | length 1382.1
  Top Layer w4.7: v2(2267.35,1268) 2334.7,1335.35 2334.7,1700.84 v2(2444.88,1811.02)
  Top Layer w10: v2(1633.75,1180.35) C108.2@1633.75,1203.95
  Signal Layer 1 w4.5: v2(1633.75,1180.35) 1647.52,1166.58 2181.97,1166.58 2267.35,1251.96 v2(2267.35,1268)
  Bottom Layer w4.7: v2(2444.88,1811.02) J1.28@2496.06,1811.02
ETH-WOL-INT: J1.32 U3.V21 | length 1819.4
  Top Layer w4.7: v2(2377,1303) 2383,1303 2384,1302 2384,1710.77 v2(2444.88,1771.65)
  Top Layer w10: U3.V21@1312.35,1239.86 v1(1328.1,1224.11)
  Signal Layer 1 w4.5: v1(1328.1,1224.11) 1337.95,1224.11 1353.51,1239.68 1367.66,1239.68 1375.38,1247.39 1375.38,1261.46 1384.77,1270.86 1471.14,1270.86 1489,1253 1543.5,1253 1600.5,1196 1600.5,1166.58 1629.07,1138 2189.24,1138 2294.92,1243.68 2363,1243.68 2377,1257.68 v2(2377,1303)
  Bottom Layer w4.7: v2(2444.88,1771.65) J1.32@2496.06,1771.65